# Altium PCB foot_left.PcbDoc
Units mm, origin at the board's own origin, x right, y up, seen from the top; angles counter-clockwise.
Board outline 100 x 65 mm, 2 copper layers (Top Layer, Bottom Layer), stack 1.52 mm thick; 55 components, 39 nets, 208 pads, 40 vias.
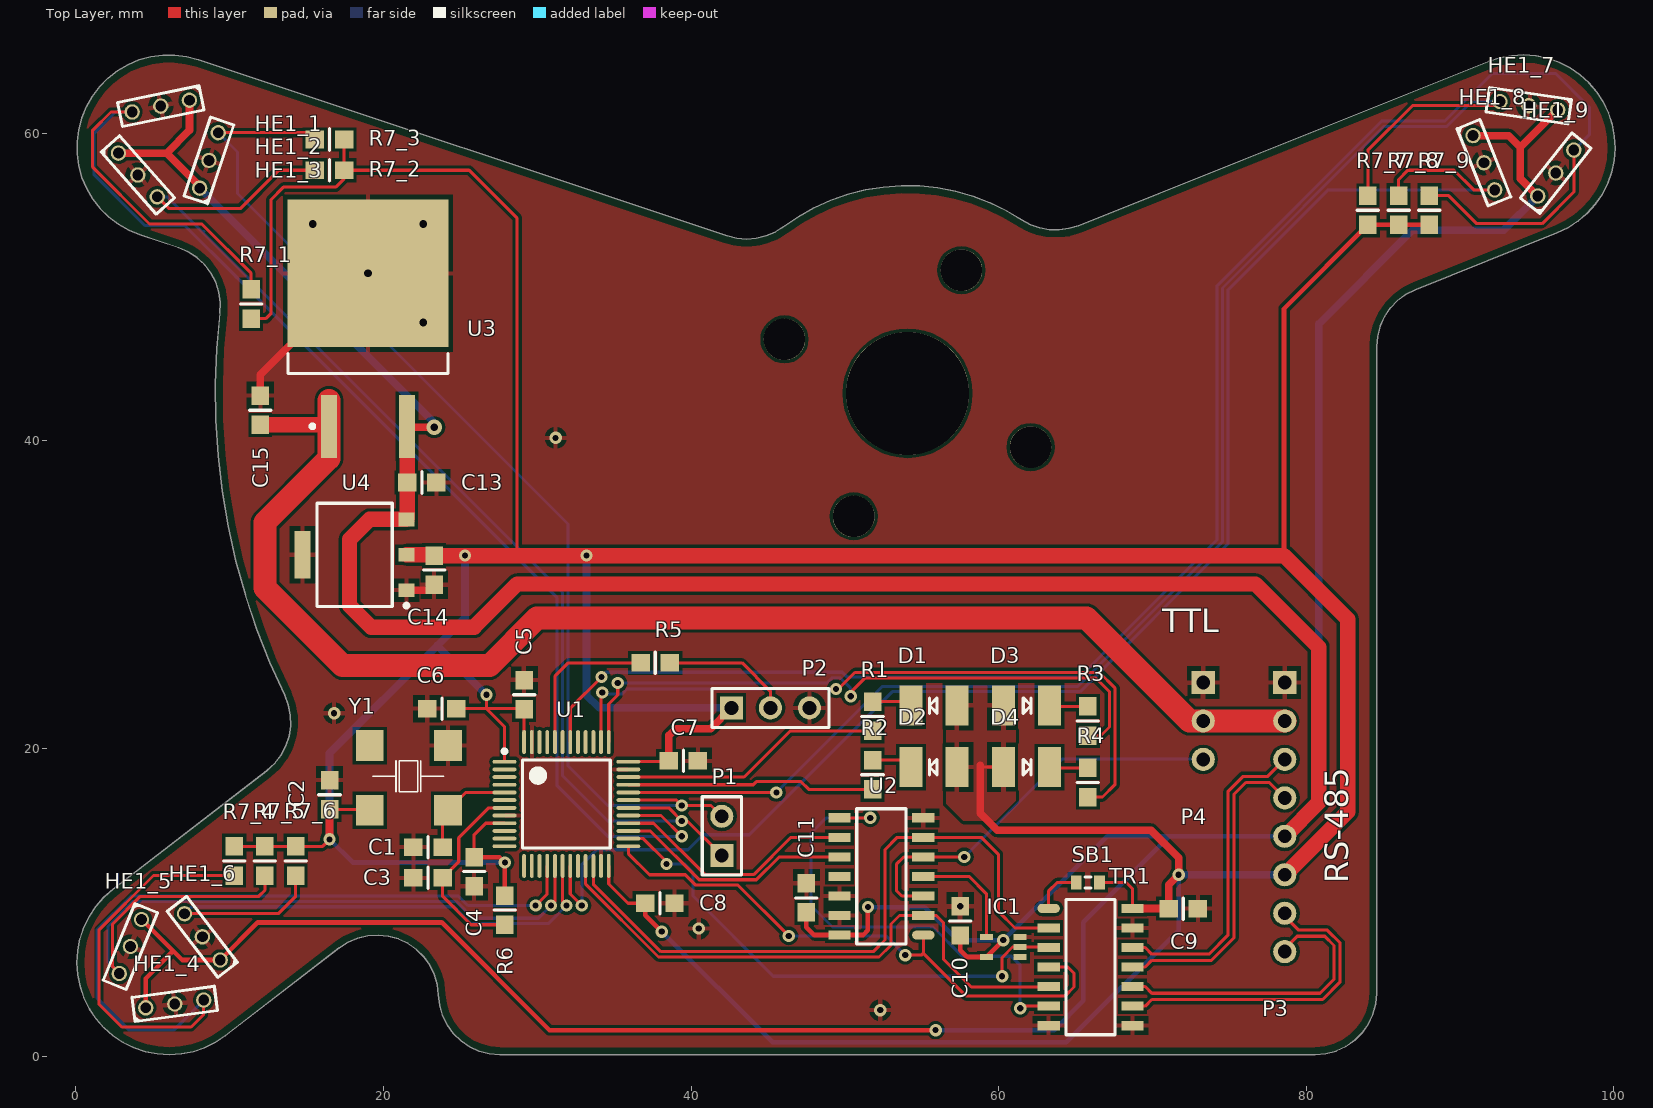
[diagram p0: Top Layer view]
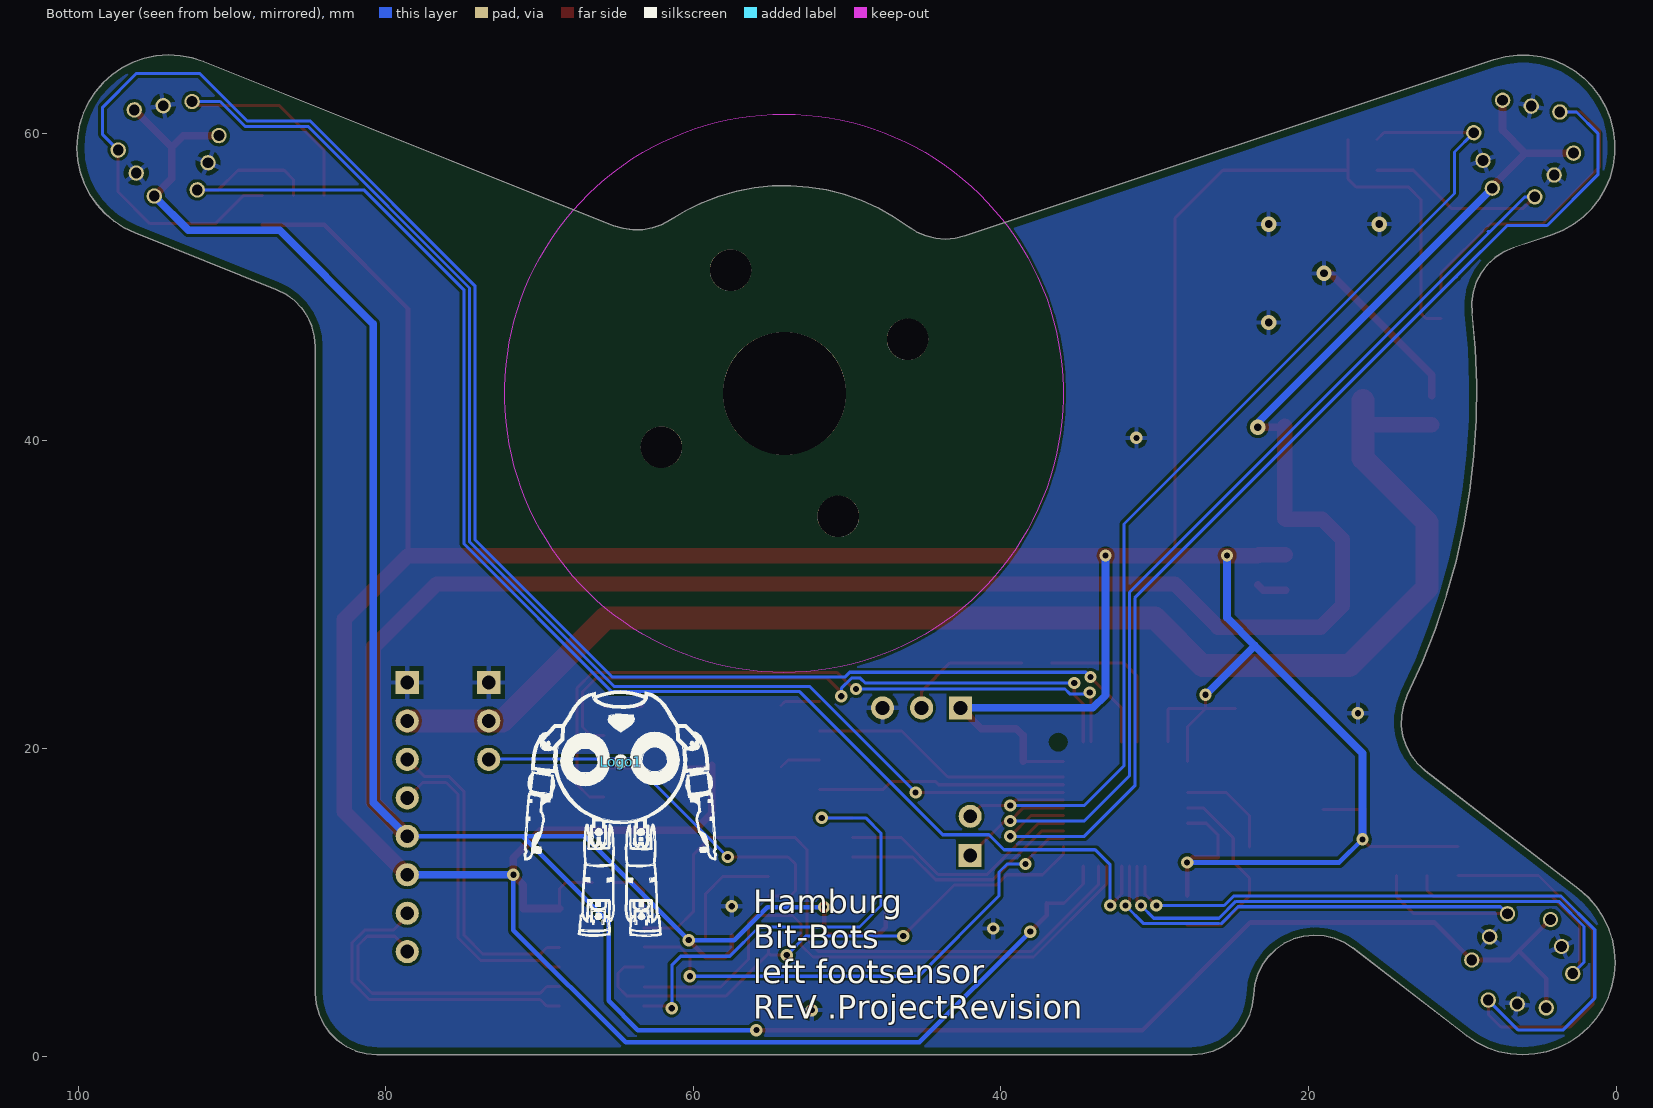
[diagram p1: Bottom Layer view, seen from below]
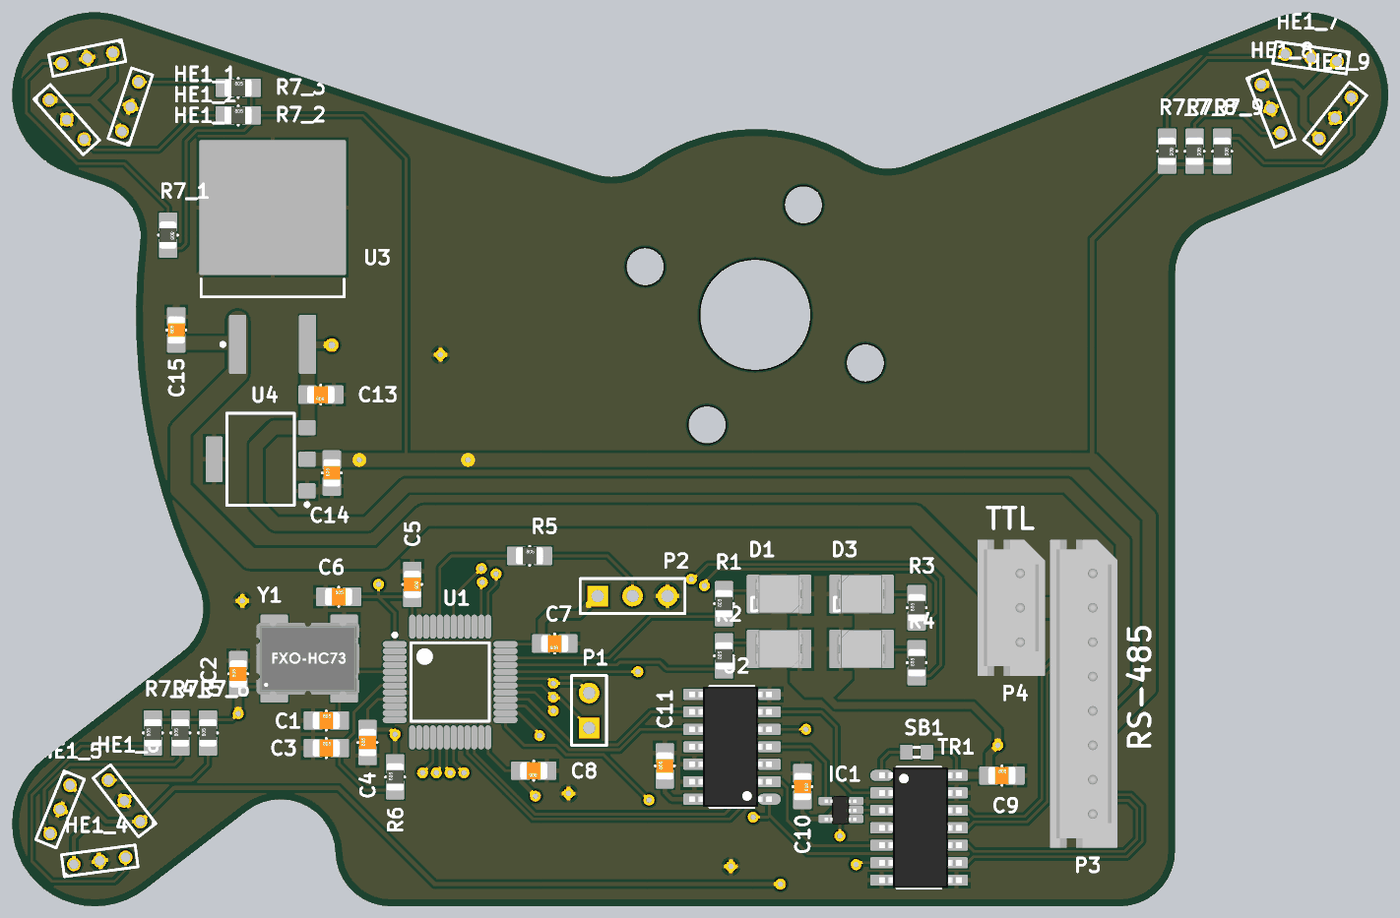
[diagram p2: 3D render of the assembled board from above, using the file's embedded part models]

## Layer stack, top to bottom
Top Solder: solder mask 0.0102, Solder Resist, Dk 3.5
Top Layer: signal copper 0.035
Dielectric 1: dielectric 1.45, FR-4, Dk 4.8
Bottom Layer: signal copper 0.035
Bottom Solder: solder mask 0.0102, Solder Resist, Dk 3.5

## Board outline
80.575,0.1 81.27,0.161 81.943,0.341 82.575,0.636 83.146,1.036 83.639,1.529 84.039,2.1 84.334,2.732 84.514,3.405 84.575,4.1 84.575,46.13 84.633,46.807 84.804,47.464 85.084,48.083 85.465,48.645 85.936,49.135 86.482,49.539 87.089,49.844 96.303,53.529 97.011,53.868 97.669,54.296 98.266,54.806 98.79,55.39 99.234,56.037 99.59,56.736 99.851,57.477 100.014,58.244 100.075,59.027 100.033,59.811 99.889,60.582 99.646,61.328 99.307,62.036 98.879,62.694 98.369,63.291 97.785,63.815 97.138,64.259 96.439,64.615 95.698,64.876 94.931,65.039 94.148,65.1 93.364,65.058 92.593,64.914 91.847,64.671 65.181,54.005 64.569,53.815 63.934,53.726 63.293,53.739 62.662,53.854 62.058,54.069 61.496,54.377 60.484,54.982 59.423,55.495 58.322,55.915 57.188,56.236 56.03,56.458 54.857,56.577 53.678,56.594 52.503,56.508 51.339,56.32 50.196,56.031 49.083,55.643 48.008,55.16 46.979,54.585 46.004,53.922 45.461,53.581 44.871,53.331 44.248,53.179 43.609,53.128 42.97,53.18 42.348,53.334 7.972,64.792 7.213,64.991 6.434,65.089 5.65,65.085 4.872,64.978 4.115,64.771 3.392,64.467 2.714,64.07 2.094,63.589 1.542,63.031 1.068,62.406 0.679,61.724 0.383,60.997 0.184,60.238 0.086,59.459 0.09,58.675 0.197,57.897 0.404,57.14 0.708,56.417 1.105,55.739 1.586,55.119 2.144,54.567 2.769,54.093 3.451,53.704 4.178,53.408 6.67,52.577 7.297,52.307 7.868,51.935 8.367,51.471 8.781,50.929 9.096,50.324 9.305,49.675 9.4,49 9.379,48.318 9.169,46.007 9.079,43.688 9.108,41.367 9.258,39.051 9.526,36.745 9.913,34.457 10.417,32.192 11.038,29.955 11.773,27.754 12.62,25.593 13.578,23.479 13.822,22.842 13.954,22.173 13.971,21.492 13.872,20.817 13.659,20.169 13.34,19.567 12.923,19.028 12.42,18.567 2.412,10.852 1.823,10.333 1.307,9.742 0.872,9.089 0.527,8.384 0.276,7.64 0.125,6.87 0.075,6.087 0.128,5.304 0.283,4.534 0.537,3.792 0.885,3.089 1.323,2.437 1.842,1.848 2.433,1.332 3.086,0.897 3.791,0.552 4.535,0.301 5.305,0.15 6.088,0.1 6.871,0.153 7.641,0.308 8.383,0.562 9.086,0.91 9.738,1.348 17.133,7.048 17.701,7.414 18.323,7.679 18.981,7.836 19.656,7.879 20.328,7.809 20.979,7.626 21.59,7.336 22.143,6.947 22.623,6.47 23.016,5.92 23.31,5.311 23.498,4.662 23.573,3.99 23.651,3.309 23.843,2.652 24.145,2.037 24.547,1.482 25.038,1.005 25.604,0.618 26.227,0.333 26.889,0.159 27.572,0.1

## Design rules (kind name [scope] priority, off if disabled: settings)
BoardOutlineClearance [All] p1: gap=0.5
Clearance [All] p1: gap=0.2 except(0.15: Track-Track)
ComponentClearance [All] p1: gap=0.2 collisioncheckmode=3 verticalgap=0.2 showdistances=FALSE
DiffPairsRouting [All] p1: maxlimit=0.3 minlimit=0.15 mostfreqgap=0.2 toplayer_minwidth=0.15 toplayer_maxwidth=0.3 toplayer_prefwidth=0.2 bottomlayer_minwidth=0.15 bottomlayer_maxwidth=0.3 bottomlayer_prefwidth=0.2 maxuncoupledlength=3
Height [All] p1: minheight=0 maxheight=30 prefheight=10
HoleSize [All] p1: absolutevalues=TRUE maxlimit=10 minlimit=0.1 maxpercent=80.000 minpercent=20.000
HoleToHoleClearance [All] p1: gap=0.2 allowstackedmicrovias=TRUE
MinimumSolderMaskSliver [All] p1: minsoldermaskwidth=0.2
PasteMaskExpansion [All] p1: expansion=0.1
PlaneClearance [All] p1: clearance=0.5
PlaneConnect [All] p1: planeconnectstyle=Relief reliefexpansion=0.5 reliefentries=4 reliefconductorwidth=0.2 reliefairgap=0.2
PolygonConnect [All] p1: connectstyle=Relief reliefconductorwidth=0.3 reliefentries=4 polygonreliefangle="90 Angle" airgapwidth=0.3
RoomDefinition "Component Keepout" [All] p1: confinementstyle=ConfineOut formatcopy=TRUE lockcomponents=FALSE outline 26.575,56.6 81.575,56.6 81.575,29.6 26.575,29.6
RoutingVias [All] p1: holewidth=0.4 width=0.8 viastyle="Through Hole" minholewidth=0.4 minwidth=0.8 maxholewidth=1 maxwidth=1.4
SilkToSilkClearance [All] p1: silktosilkclearance=0.1
SilkToSolderMaskClearance [IsPad] p1: minsilkscreentomaskgap=0.1 clearancetoexposedcopper=TRUE
SolderMaskExpansion [All] p1: expansion=0.1
Width Width_RS485 [(InDifferentialPairClass('All Differential Pairs'))] p1: maxlimit=0.254 minlimit=0.254 preferedwidth=0.254 impedancedriven=TRUE minimp=110.000000 maximp=130.000000 favimp=120.000000
Width [All] p2: maxlimit=5 minlimit=0.15 preferedwidth=0.2 minimp=50.000000 maximp=50.000000 favimp=50.000000
19 further rules are at their usual default settings.

## Classes and differential pairs
component class VR: C13 C14 C15 U3 U4
channel class A1356: HallSensorA HallSensorB HallSensorC HallSensorD HallSensorE HallSensorF HallSensorG HallSensorH HallSensorI
net class OUT[1..9]: OUT1 OUT2 OUT3 OUT4 OUT5 OUT6 OUT7 OUT8 OUT9
component class Connector: C9 C10 C11 IC1 P3 P4 SB1 TR1 U2
component class HallSensorI: HE1_9 R7_9
component class HallSensorH: HE1_8 R7_8
component class HallSensorG: HE1_7 R7_7
component class HallSensorF: HE1_6 R7_6
component class HallSensorE: HE1_5 R7_5
component class HallSensorD: HE1_4 R7_4
component class HallSensorC: HE1_3 R7_3
component class HallSensorB: HE1_2 R7_2
component class HallSensorA: HE1_1 R7_1
component class mainsheet: C1 C2 C3 C4 C5 C6 C7 C8 D1 D2 D3 D4 Logo1 P1 P2 R1 R2 R3 R4 R5 R6 U1 Y1
differential pair DY: +DY_P -DY_N
differential pair DA: +DA_P -DA_N

## Components (designator, comment, footprint, x,y, rotation, side; value= is the part's Value field where it differs from the comment)
C1 "15pF" C2012 22.9,13.6 r0 top
C2 "100nF" C2012 16.5,17 r90 top
C3 "100nF" C2012 22.9,11.6 r0 top
C4 "100nF" C2012 25.9,12 r90 top
C5 "100nF" C2012 29.15,23.5 r270 top
C6 "100nF" C2012 23.8,22.6 r0 top
C7 "100nF" C2012 39.5,19.2 r180 top
C8 "100nF" C2012 37.975,9.95 r180 top
C9 "1uF" C2012 72,9.6 r0 top
C10 "100nF" C2012 57.5,8.8 r270 top
C11 "1uF" C2012 47.5,10.3 r90 top
C13 "10uF" C2012 22.5,37.3 r180 top
C14 "10uF" C2012 23.3,31.6 r90 top
C15 "1uF" C2012 12,42 r90 top
D1 "Green" MLCC2 55.8,22.8 r180 top
D2 "Green" MLCC2 55.8,18.8 r180 top
D3 "Green" MLCC2 61.8,22.8 r0 top
D4 "Green" MLCC2 61.8,18.8 r0 top
HE1_1 "A1356" "3-PIN SIP" 7.39,62.15 r191.57 top locked (schematic designator HE1)
HE1_2 "A1356" "3-PIN SIP" 2.776,58.714 r311.58 top locked (schematic designator HE1)
HE1_3 "A1356" "3-PIN SIP" 8.057,56.437 r71.52 top locked (schematic designator HE1)
HE1_4 "A1356" "3-PIN SIP" 4.553,3.148 r7.62 top locked (schematic designator HE1)
HE1_5 "A1356" "3-PIN SIP" 4.279,8.894 r247.63 top locked (schematic designator HE1)
HE1_6 "A1356" "3-PIN SIP" 9.392,6.258 r127.63 top locked (schematic designator HE1)
HE1_7 "A1356" "3-PIN SIP" 96.344,61.525 r171.8 top locked (schematic designator HE1)
HE1_8 "A1356" "3-PIN SIP" 90.84,59.852 r291.81 top locked (schematic designator HE1)
HE1_9 "A1356" "3-PIN SIP" 95.041,55.922 r51.79 top locked (schematic designator HE1)
IC1 "74AHC1G04" SOT-353 60.3,7.1 r180 top
Logo1 "Hamburg Bit-Bots Logo" Logo 64.7,19.15 r180 bottom
P1 "Programming" HDR1X2 42,13.06 r90 top
P2 "Boot0" HDR1X3 42.62,22.65 r0 top
P3 "RS-485" 8-PIN 78.6,24.3 r270 top locked
P4 "TTL" 3-PIN 73.3,24.3 r270 top locked
R1 "1k" R2012 51.8,22.1 r90 top
R2 "1k" R2012 51.8,18.3 r90 top
R3 "1k" R2012 65.8,21.8 r90 top
R4 "1k" R2012 65.8,17.8 r90 top
R5 "4k7" R2012 37.675,25.575 r0 top
R6 "4k7" R2012 27.9,9.5 r90 top
R7_1 "4k7" R2012 11.4,48.9 r270 top (schematic designator R7)
R7_2 "4k7" R2012 16.5,57.6 r0 top (schematic designator R7)
R7_3 "4k7" R2012 16.5,59.6 r0 top (schematic designator R7)
R7_4 "4k7" R2012 10.3,12.7 r90 top (schematic designator R7)
R7_5 "4k7" R2012 12.3,12.7 r90 top (schematic designator R7)
R7_6 "4k7" R2012 14.3,12.7 r90 top (schematic designator R7)
R7_7 "4k7" R2012 84,55 r270 top (schematic designator R7)
R7_8 "4k7" R2012 86,55 r270 top (schematic designator R7)
R7_9 "4k7" R2012 88,55 r270 top (schematic designator R7)
SB1 "Solder Bridge" J1-0603 65.8,11.3 r0 top
TR1 "MAX3079" SOIC14 65.975,5.8 r0 top
U1 "STM32F100C8T6BTR" STM-LQFP48_L 31.9,16.4 r0 top
U2 "74HC126" SOIC14 52.375,11.69 r180 top
U3 "L7805CD2T-TR" TO-263_M 19,47.3 r90 top
U4 "NCP1117ST33T3G" ONSC-SOT-223_L 18.125,32.6 r180 top
Y1 "FXO-HC736R-16" FXO-HC73 19.12,20.2 r0 top

## Footprints (in the part's own frame and the unit in brackets; to place one, negate y for a bottom-side part, rotate by r counter-clockwise, add the part's x,y. Pads: shape width x height; smd on the part's side, far side on the other; paste and mask are expansions set on the pad)
3-PIN [mm] "2.5mm pitch"
  rect 1.5x1.5 hole 0.9: 1(0,0)
  round 1.5 hole 0.9: 2(2.5,0) 3(5,0)
  body extent -2.45,-3.07 7.45,1.83, height 5.95
"3-PIN SIP" [mm]
  round 1 hole 0.7: 1(0,0) 2(1.9,0) 3(3.8,0)
  silkscreen extent -0.8,-0.8 4.6,0.8
8-PIN [mm] "2.5mm pitch"
  rect 1.5x1.5 hole 0.9: 1(0,0)
  round 1.5 hole 0.9: 2(2.5,0) 3(5,0) 4(7.5,0) 5(10,0) 6(12.5,0) 7(15,0) 8(17.5,0)
  body extent -2.45,-3.1 19.95,1.8, height 5.95
C2012 [mm]
  rect 1.2x1.14 smd: 1(-0.95,0) 2(0.95,0)
  silkscreen extent 0,-0.7 0,0.7, body extent -1,-0.62 1,0.63, height 0.78
FXO-HC73 [mm]
  rect 1.8x2 smd: 1(0,0) 2(5.08,0) 3(5.08,-4.2) 4(0,-4.2)
  silkscreen extent 0.2,-3 4.8,-1, body extent -1.3,-4.71 6.2,0.51, height 1.41
HDR1X2 [mm] "Connector; Header; 2 Position"
  rect 1.5x1.5 hole 0.9: 1(0,0)
  round 1.5 hole 0.9: 2(2.54,0)
  silkscreen extent -1.27,-1.27 3.81,1.27
HDR1X3 [mm] "Connector; Header; 3 Position"
  rect 1.5x1.5 hole 0.9: 1(0,0)
  round 1.5 hole 0.9: 2(2.54,0) 3(5.08,0)
  silkscreen extent -1.27,-1.27 6.35,1.27
J1-0603 [mm] "Chip Resistor, Body 1.6x0.8mm, IPC High Density"
  rect 0.7x0.9 smd: 1(-0.75,0) 2(0.75,0)
  silkscreen extent -0.2,-0.35 0.2,0.35, body extent -0.85,-0.48 0.85,0.48, height 0.9
Logo [mm] "Logo of Hamburg Bit-Bots"
  silkscreen extent -6.31,-11.39 6.2,4.6
MLCC2 [mm]
  rect 1.5x2.6 smd: 1(-1.5,0) 2(1.5,0)
  silkscreen extent -0.2,-0.5 0.3,0.5, body extent -1.75,-1.4 1.75,1.4, height 1.7
ONSC-SOT-223_L [mm] "SOT223, 4-Leads, Body 3.7x6.7mm, Pitch 2.3mm, IPC High Density"
  rect 1.05x0.9 smd: 1(-3.375,2.3) 2(-3.375,0) 3(-3.375,-2.3)
  rect 1.05x3.1 smd: 4(3.375,0)
  silkscreen extent -3.5,-3.35 2.45,3.42, body extent -1.85,-3.35 1.85,3.35, height 1.8
R2012 [mm]
  rect 1.2x1.14 smd: 1(-0.95,0) 2(0.95,0)
  silkscreen extent 0,-0.7 0,0.7, body extent -1,-0.62 1,0.63, height 0.78
SOIC14 [mm] "SOIC, 14-Leads, Body 8,65x3,90mm, Pitch 1,27mm, IPC Medium Density"
  oval 1.45x0.6 smd: 1(-2.725,3.81)
  rect 1.45x0.6 smd: 2(-2.725,2.54) 3(-2.725,1.27) 4(-2.725,0) 5(-2.725,-1.27) 6(-2.725,-2.54) 7(-2.725,-3.81) 8(2.725,-3.81) 9(2.725,-2.54) 10(2.725,-1.27) 11(2.725,0) 12(2.725,1.27) 13(2.725,2.54) 14(2.725,3.81)
  silkscreen extent -1.6,-4.4 1.6,4.4, body extent -2.9,-4.37 3.1,4.37, height 1.75
SOT-353 [mm] "SOT23, 5-Leads, Body 2,05x2,13mm, Pitch 0,65mm, IPC Medium Density"
  rect 0.85x0.4 smd: 1(-1.1,0.65) 2(-1.1,0) 3(-1.1,-0.65) 4(1.1,-0.65) 5(1.1,0.65)
  body extent -1.13,-1.02 1.17,1.08, height 1
STM-LQFP48_L [mm] "QFP, 48-Leads, Body 7x7mm, Pitch 0.5mm, IPC High Density"
  oval 1.55x0.25 smd: 1(-4.025,2.75) 2(-4.025,2.25) 3(-4.025,1.75) 4(-4.025,1.25) 5(-4.025,0.75) 6(-4.025,0.25) 7(-4.025,-0.25) 8(-4.025,-0.75) 9(-4.025,-1.25) 10(-4.025,-1.75) 11(-4.025,-2.25) 12(-4.025,-2.75) 25(4.025,-2.75) 26(4.025,-2.25) 27(4.025,-1.75) 28(4.025,-1.25) 29(4.025,-0.75) 30(4.025,-0.25) 31(4.025,0.25) 32(4.025,0.75) 33(4.025,1.25) 34(4.025,1.75) 35(4.025,2.25) 36(4.025,2.75)
  oval 0.25x1.55 smd: 13(-2.75,-4.025) 14(-2.25,-4.025) 15(-1.75,-4.025) 16(-1.25,-4.025) 17(-0.75,-4.025) 18(-0.25,-4.025) 19(0.25,-4.025) 20(0.75,-4.025) 21(1.25,-4.025) 22(1.75,-4.025) 23(2.25,-4.025) 24(2.75,-4.025) 37(2.75,4.025) 38(2.25,4.025) 39(1.75,4.025) 40(1.25,4.025) 41(0.75,4.025) 42(0.25,4.025) 43(-0.25,4.025) 44(-0.75,4.025) 45(-1.25,4.025) 46(-1.75,4.025) 47(-2.25,4.025) 48(-2.75,4.025)
  silkscreen extent -4.15,-2.85 2.85,3.55, body extent -3.5,-3.5 3.5,3.5, height 1.6
TO-263_M [mm] "D2-PAK, 4-Leads, Body 9.2x10.2mm, Pitch 2.54mm, Lead Span 15.4mm, IPC Low Density"
  rect 4.1x1.05 smd: 1(-6.35,2.54) 3(-6.35,-2.54)
  rect 9.6x10.45 smd: 4(3.6,0)
  silkscreen extent -6.47,-5.2 -1.6,5.2, body extent -2.9,-5.2 6.45,5.2, height 4.6

## Part data
C1 C2 C3 C4 C5 C6 C7 C8 C10 C11 C13 C14 C15: library part Cap, "Capacitor"
C9: library part "Cap Semi", "Capacitor"
D1 D2 D3 D4: library part LED0, "Typical INFRARED GaAs LED"
HE1_1 HE1_2 HE1_3 HE1_4 HE1_5 HE1_6 HE1_7 HE1_8 HE1_9: "Linear Hall-Effect Sensor"
IC1: "Single Logic Inverter"
Logo1: library part Logo
P1: library part "Header 2", "Header, 2-Pin"
P2 P4: library part "Header 3", "Header, 3-Pin"
P3: library part "Header 8", "Header, 8-Pin"
R1 R2 R3 R4 R5 R6 R7_1 R7_2 R7_3 R7_4 R7_5 R7_6 R7_7 R7_8 R7_9: library part Res2, "Resistor"
SB1: library part Res3, "Resistor"
TR1: "MAX3079 RS485-Transreceiver"
U1: library part CMP-0237-00141-3, "ARM Cortex-M3 32-bit MCU, 64 KB Flash, 8 KB Internal RAM, 37 I/Os, 48-pin LQFP, -40 to 85 degC, Tape and Reel"
U2: "Quad 3-State Noninverting Buffer"
U3: library part CMP-0244-00213-1, "Positive Voltage Regulator, 3-Pin D2PAK, Tape and Reel"
U4: library part CMP-0592-00001-2, "1.0 A Low-Dropout Positive Fixed Voltage Regulator, 5 V Vout, 0 to 125 degC, 4-Pin SOT-223, Pb-Free, Tape and Reel"
Y1: library part Oszillator, "Oscillator with Enable Input"

## Free pads (board coordinates)
  round 2.7 hole 2.7 unplated: DH(46.075,46.6) DH(50.575,35.1) DH(57.575,51.1) DH(62.075,39.6)
  round 8 hole 8 unplated: DH(54.075,43.1)

## Via types
v1: diameter 0.8/0.8 (per signal layer), hole 0.4, Top Layer to Bottom Layer, 35 vias
v2: diameter 1/1 (per signal layer), hole 0.5, Top Layer to Bottom Layer, 5 vias

## Nets (pads, with @x,y where several pads share a name; then routed paths per layer and width w, separated by ;. In a path a pad name is that pad's centre, name@x,y a point inside that pad or via, vN(x,y) a via of type N, cw(c..) or ccw(c..) an arc to the next point about the centre after c; other vN are vias at no path point)
+3V3: C2.1 C4.2 C5.2 C6.2 C7.2 C8.2 C9.1 C14.2 D1.1 D2.1 D3.1 D4.1 P2.1 P3.6 R6.2 R7_1.2 R7_2.2 R7_3.2 R7_4.2 R7_5.2 R7_6.2 R7_7.2 R7_8.2 R7_9.2 SB1.2 TR1.14 U1.1 U1.9 U1.24 U1.36 U1.48 U4.2 Y1.4 | length 341.7
  Top Layer w0.2: R7_4.2 R7_5.2 R7_6.2 16.05,13.65 v1(16.5,14.1) ; R7_1.2 12.35,47.95 12.7,48.3 12.7,55.7 13.5,56.5 16.9,56.5 17.45,57.05 R7_2.2 ; C2.1 Y1.4@19.07,16.05 ; R7_3.2 R7_2.2 ; C6.2 26.7,22.6 ; C4.2 25.9,14.4 26.65,15.15 U1.9 ; v1(26.7,23.5) 26.7,22.6 ; U1.1 27.875,21.425 26.7,22.6 ; 28.7,32.55 28.7,54.475 25.575,57.6 R7_2.2 ; U1.48 C5.2 29.1,22.6 26.7,22.6 ; U1.24 34.65,11.2 35.9,9.95 C8.2 ; U1.36 C7.2@38.5,19.15 ; 58.8,18.9 58.9,18.8 D4.1 ; SB1.2 68.3,11.3 68.7,10.9 TR1.14
  Top Layer w0.3: C4.2 27.55,12.95 v1(27.9,12.6) R6.2 ; C8.2 37.025,9.175 v1(38.1,8.1) ; 78.55,32.55 78.55,48.6 R7_7.2 R7_8.2 R7_9.2
  Top Layer w0.5: v1(16.5,14.1) C2.1 ; C7.2 38.55,20.85 39,21.3 41.27,21.3 P2.1 ; 58.8,18.9 58.8,15.8 59.9,14.7 69.9,14.7 71.7,12.9 v1(71.7,11.8) 71.05,11.15 C9.1 71.04,9.61 TR1.14
  Top Layer w1: U4.2 23.25,32.6 C14.2 v1(25.3,32.55) 28.7,32.55 v1(33.2,32.55) 78.55,32.55 82.7,28.4 82.7,15.9 P3.6
  Bottom Layer w0.3: v1(16.5,14.1) 18,12.6 v1(27.9,12.6) ; v1(38.1,8.1) 45.3,0.9 64.4,0.9 71.7,8.2 v1(71.7,11.8)
  Bottom Layer w0.5: v1(16.5,14.1) 16.5,19.7 23.5,26.7 ; v1(25.3,32.55) 25.3,28.5 23.5,26.7 ; v1(26.7,23.5) 23.8,26.4 23.5,26.7 ; v1(33.2,32.55) 33.2,23.48 34.03,22.65 P2.1 ; v1(71.7,11.8) P3.6
+5V: C10.2 C11.1 C13.2 HE1_1.1 HE1_2.1 HE1_3.1 HE1_4.1 HE1_5.1 HE1_6.1 HE1_7.1 HE1_8.1 HE1_9.1 IC1.5 P3.5 U2.14 U3.3 U4.3 | length 317.1
  Top Layer w0.3: HE1_5.1 6.387,6.787 ; HE1_4.1 4.553,5.053 6.287,6.787 6.387,6.787 ; C11.1 47.5,8.4 48.02,7.88 U2.14 51.18,7.88 51.5,8.2 v1(51.5,9.7) ; v1(55.9,1.7) 30.8,1.7 23.8,8.7 11.834,8.7 HE1_6.1 6.915,6.258 6.387,6.787 ; C10.2 57.5,6.9 57.95,6.45 IC1.5 v1(60.3,7.55)
  Top Layer w0.5: HE1_2.1 5.914,58.714 ; HE1_1.1 7.39,60.19 5.914,58.714 ; HE1_3.1 8.057,56.571 5.914,58.714 ; U3.3 21.59,40.9 v2(23.3,40.9) ; HE1_8.1 93.148,59.852 93.9,59.1 ; HE1_9.1 93.9,57.063 93.9,59.1 ; HE1_7.1 93.919,59.1 93.9,59.1
  Top Layer w1: U3.3 21.54,34.94 U4.3 19.1,34.9 17.8,33.6 17.8,29.3 19.2,27.9 25.9,27.9 28.7,30.7 76.7,30.7 80.8,26.6 80.8,16.5 P3.5
  Bottom Layer w0.3: v1(51.5,9.7) 55.2,9.7 57.35,7.55 v1(60.3,7.55) 67.05,14.3 71.1,14.3 ; v1(55.9,1.7) 63.6,1.7 65.5,3.6 65.5,8.7 71.1,14.3 ; P3.5 71.1,14.3
  Bottom Layer w0.5: HE1_3.1 23.3,41.193 v2(23.3,40.9) ; P3.5 80.8,16.5 80.8,47.6 86.9,53.7 92.818,53.7 HE1_9.1
+12V: C15.1 P3.2 P4.2 U3.1 | length 90.7
  Top Layer w1: C15.1 U3.1@16.36,41.05
  Top Layer w1.5: U3.1@16.46,42.64 U3.1 16.46,38.86 12.3,34.7 12.3,30.461 17.361,25.4 26.9,25.4 30,28.5 65.7,28.5 72.4,21.8 P4.2 P3.2
\RST: C3.2 R6.1 U1.7 | length 12.8
  Top Layer w0.2: U1.7 26.85,16.15 24.9,14.2 24.9,12.65 C3.2 23.85,10.4 25.7,8.55 R6.1
BOOT0: R5.1 U1.44 | length 10.2
  Top Layer w0.2: U1.44 31.15,24.7 32.025,25.575 R5.1
DA_N: P3.4 TR1.11 | length 20.8
  Top Layer w0.2: TR1.11 69.525,5.8 69.96,6.235 73.835,6.235 75.3,7.7 75.3,17.034 76.066,17.8 77.6,17.8 P3.4
DA_P: P3.3 TR1.12 | length 20.8
  Top Layer w0.2: TR1.12 69.525,7.07 69.96,6.635 73.669,6.635 74.9,7.866 74.9,17.2 75.9,18.2 77.5,18.2 P3.3
DY_N: P3.7 TR1.9 | length 21
  Top Layer w0.2: TR1.9 69.525,3.26 69.96,3.695 81.061,3.695 82.2,4.834 82.2,7.366 81.366,8.2 79.5,8.2 P3.7@78.6,9.1
DY_P: P3.8 TR1.10 | length 19.6
  Top Layer w0.2: TR1.10 69.525,4.53 69.96,4.095 80.895,4.095 81.8,5 81.8,7.2 81.2,7.8 79.4,7.8 P3.8@78.6,7
GND: C1.1 C2.2 C3.1 C4.1 C5.1 C6.1 C7.1 C8.1 C9.2 C10.1 C11.2 C13.1 C14.1 C15.2 HE1_1.2 HE1_2.2 HE1_3.2 HE1_4.2 HE1_5.2 HE1_6.2 HE1_7.2 HE1_8.2 HE1_9.2 IC1.3 P2.3 P3.1 P4.1 TR1.7 TR1.8 TR1.13 U1.8 U1.23 U1.35 U1.47 U2.7 U2.12 U2.13 U3.4 U4.1 U4.4 Y1.2 | length 13
  Top Layer w0.5: C15.2 12,44.3 18.6,50.9 v2(19,50.9) ; U4.1 22.95,30.3 C14.1
  other v1: 52.3,3 40.5,8.3 57.5,9.75 16.8,22.3 31.2,40.2
  other v2: 22.6,47.7 15.4,54.1 22.6,54.1
NetC1_2: C1.2 U1.5 Y1.3 | length 6.7
  Top Layer w0.2: C1.2 23.85,15.65 Y1.3 25.35,17.15 U1.5
NetD1_2: D1.2 R1.2 | length 2.6
  Top Layer w0.2: R1.2 54.05,23.05 D1.2
NetD2_2: D2.2 R2.2 | length 2.7
  Top Layer w0.2: R2.2 53.85,19.25 D2.2
NetD3_2: D3.2 R3.2 | length 2.5
  Top Layer w0.2: D3.2 63.35,22.75 R3.2
NetD4_2: D4.2 R4.2 | length 2.5
  Top Layer w0.2: D4.2 63.35,18.75 R4.2
NetIC1_4: IC1.4 U2.4 | length 7.4
  Top Layer w0.2: U2.4 58.085,11.69 59.2,10.575 IC1.4
NetP2_2: P2.2 R5.2 | length 8.4
  Top Layer w0.2: R5.2 43.325,25.575 45.16,23.74 P2.2
NetR1_1: R1.1 U1.34 | length 17.1
  Top Layer w0.2: U1.34 43.45,18.15 46.45,21.15 R1.1
NetR2_1: R2.1 U1.33 | length 16.2
  Top Layer w0.2: U1.33 44.05,17.65 44.25,17.85 47.15,17.85 47.65,17.35 R2.1
NetR3_1: R3.1 U1.37 | length 41.9
  Top Layer w0.2: U1.37 34.65,22.9 35.238,23.488 v1(35.238,24.263) ; v1(50.38,23.403) 50.38,23.655 51.325,24.6 66.3,24.6 67.2,23.7 67.2,21.4 66.65,20.85 R3.1
  Bottom Layer w0.2: v1(35.238,24.263) 48.825,24.263 49.14,24.578 49.72,24.578 50.38,23.918 v1(50.38,23.403)
NetR4_1: R4.1 U1.38 | length 46
  Top Layer w0.2: U1.38 34.15,23.567 v1(34.233,23.65) ; v1(49.43,23.878) 49.578,23.878 50.65,24.95 66.55,24.95 67.55,23.95 67.55,17.65 66.75,16.85 R4.1
  Bottom Layer w0.2: v1(34.233,23.65) 34.319,23.563 35.528,23.563 35.843,23.878 v1(49.43,23.878)
NetSB1_1: SB1.1 TR1.1 | length 3.2
  Top Layer w0.2: TR1.1 63.25,10.75 63.8,11.3 SB1.1
OUT1: HE1_1.3 R7_1.1 U1.29 | length 92.6
  Top Layer w0.2: HE1_1.3 2.288,61.388 1.1,60.2 1.1,57.8 4.8,54.1 8.2,54.1 11.4,50.9 R7_1.1 ; U1.29 38.05,15.65 v1(39.4,14.3)
  Bottom Layer w0.2: HE1_1.3 2.588,61.388 1.2,60 1.2,57.3 4.492,54.008 7.092,54.008 10.4,50.7 ; 10.375,50.675 10.4,50.7 ; v1(39.4,14.3) 34.586,14.3 31.3,17.586 31.3,29.8 10.4,50.7
OUT2: HE1_2.3 P1.1 R7_2.1 U1.30 | length 77
  Top Layer w0.2: HE1_2.3 6.069,55.1 10.7,55.1 13.2,57.6 R7_2.1 ; U1.30 38.55,16.15 v1(39.4,15.3) 39.76,15.3 P1.1
  Bottom Layer w0.2: HE1_2.3 5.936,55.871 8.191,53.616 ; 8.341,53.616 8.191,53.616 ; v1(39.4,15.3) 34.586,15.3 31.65,18.236 31.65,30.157 8.191,53.616
OUT3: HE1_3.3 P1.2 R7_3.1 U1.31 | length 72
  Top Layer w0.2: HE1_3.3 15.109,60.041 R7_3.1 ; U1.31 39.05,16.65 v1(39.4,16.3) 41.3,16.3 P1.2
  Bottom Layer w0.2: HE1_3.3 10.514,58.788 10.514,56.086 32,34.6 32,18.886 34.586,16.3 v1(39.4,16.3)
OUT4: HE1_4.3 R7_4.1 U1.16 | length 69.4
  Top Layer w0.2: HE1_4.3 8.32,2.72 7.5,1.9 3,1.9 1.5,3.4 1.5,8.195 5.055,11.75 R7_4.1 ; v1(29.9,9.8) 30.65,10.55 U1.16
  Bottom Layer w0.2: HE1_4.3 6.368,1.7 3.477,1.7 1.4,3.777 1.4,8.227 3.591,10.418 24.877,10.418 25.495,9.8 v1(29.9,9.8)
OUT5: HE1_5.3 R7_5.1 U1.17 | length 51.5
  Top Layer w0.2: HE1_5.3 2.4,5.813 2.4,8.6 4.2,10.4 11.9,10.4 12.3,10.8 R7_5.1 ; v1(30.9,9.8) 31.15,10.05 U1.17
  Bottom Layer w0.2: HE1_5.3 2.1,6.113 2.1,8.432 3.736,10.068 24.732,10.068 25.825,8.975 30.075,8.975 v1(30.9,9.8)
OUT6: HE1_6.3 R7_6.1 U1.18 | length 37.5
  Top Layer w0.2: HE1_6.3 13.168,9.268 14.3,10.4 R7_6.1 ; U1.18 31.65,10.05 v1(31.9,9.8)
  Bottom Layer w0.2: HE1_6.3 7.522,9.718 24.587,9.718 25.68,8.625 ; 25.825,8.625 30.725,8.625 v1(31.9,9.8)
OUT7: HE1_7.3 R7_7.1 U1.32 | length 97.8
  Top Layer w0.2: U1.32 v1(45.55,17.15) ; R7_7.1 84,58.9 86.9,61.8 92.316,61.8 HE1_7.3
  Bottom Layer w0.2: v1(45.55,17.15) 52.45,24.05 65.155,24.05 74.55,33.445 74.55,49.95 85.05,60.45 89.145,60.45 90.762,62.067 HE1_7.3
OUT8: HE1_8.3 R7_8.1 U1.19 | length 101
  Top Layer w0.2: U1.19 32.15,10.55 v1(32.9,9.8) ; R7_8.1 86,57 86.6,57.6 89.6,57.6 90.876,56.324 HE1_8.3 HE1_8.3@92.126,56.45
  Bottom Layer w0.2: v1(32.9,9.8) 32.9,12.45 33.875,13.425 39.8,13.425 40.775,14.4 43.79,14.4 53.09,23.7 65.3,23.7 74.9,33.3 74.9,49.805 81.419,56.324 HE1_8.3
OUT9: HE1_9.3 R7_9.1 U1.42 | length 113.3
  Top Layer w0.2: U1.42 32.15,22.625 v1(34.175,24.65) ; R7_9.1 89.25,55.95 91.071,54.129 95.329,54.129 97.391,56.191 HE1_9.3
  Bottom Layer w0.2: v1(34.175,24.65) 34.488,24.963 49.83,24.963 50.147,24.646 65.256,24.646 74.2,33.59 74.2,50.1 84.9,60.8 89,60.8 92.1,63.9 96.2,63.9 98.4,61.7 98.4,59.918 HE1_9.3
SRL: TR1.6 U2.8 | length 30.9
  Top Layer w0.2: U2.8 v1(51.65,15.5) ; v1(61.4,3.125) 61.535,3.26 TR1.6
  Bottom Layer w0.2: v1(51.65,15.5) 48.8,15.5 47.8,14.5 47.8,9.8 49.2,8.4 55.725,8.4 57.625,6.5 60.825,6.5 61.4,5.925 v1(61.4,3.125)
TRI1.A: U1.28 U2.9 | length 16.1
  Top Layer w0.2: U1.28 37.56,15.15 40.885,11.825 44.1,11.825 46.505,14.23 U2.9
TRI1.OE: U1.27 U2.10 | length 15.7
  Top Layer w0.2: U1.27 37.35,14.65 40.525,11.475 44.245,11.475 45.73,12.96 U2.10
TTL_BRIDGE.\RE: IC1.2 TR1.3 U1.26 | length 33.5
  Top Layer w0.2: U1.26 36.893,14.15 38.4,12.643 v1(38.4,12.5) ; v1(60.225,5.2) 60.225,6.425 60.9,7.1 IC1.2 TR1.3@63.22,7.1
  Bottom Layer w0.2: v1(38.4,12.5) 39.6,12.5 40.125,11.975 40.125,10.425 45.35,5.2 v1(60.225,5.2)
TTL_BRIDGE.DE: TR1.4 U1.25 U2.1 | length 37.5
  Top Layer w0.2: U1.25 35.925,13.175 37.3,11.8 39.625,11.8 40.3,11.125 43.05,11.125 v1(46.35,7.825) ; v1(53.925,6.575) 54.975,6.575 55.1,6.7 ; U2.1 55.1,6.7 ; TR1.4 64.5,5.8 64.9,5.4 64.9,4.5 64.33,3.93 57.87,3.93 55.1,6.7
  Bottom Layer w0.2: v1(46.35,7.825) 52.675,7.825 v1(53.925,6.575)
TTL_BRIDGE.RX: TR1.2 U1.22 U2.6 | length 43.7
  Top Layer w0.2: U1.22 33.65,11.185 38.035,6.8 51.85,6.8 52.605,7.555 52.605,13.43 53.405,14.23 U2.6 58.87,14.23 59.975,13.125 59.975,9.425 61.06,8.34 TR1.2
TTL_BRIDGE.TX: TR1.5 U1.21 U2.2 | length 38.5
  Top Layer w0.2: U1.21 33.15,11.19 37.89,6.45 52.225,6.45 53,7.225 53,8.6 53.55,9.15 U2.2 55.95,9.15 56.4,8.7 56.4,6.325 58.225,4.5 TR1.5@63.22,4.5
TTL_DATA: P4.3 U2.3 U2.5 | length 26.4
  Top Layer w0.2: U2.3 53.705,10.42 53.35,10.775 53.35,12.475 53.835,12.96 U2.5 v1(57.76,12.96)
  Bottom Layer w0.2: v1(57.76,12.96) 64.125,19.325 73.275,19.325 P4.3
pads on no net: IC1.1 U1.2 U1.3 U1.4 U1.6 U1.10 U1.11 U1.12 U1.13 U1.14 U1.15 U1.20 U1.39 U1.40 U1.41 U1.43 U1.45 U1.46 U2.11 Y1.1

## Polygon pours and split planes (outlines as drawn)
GND on Bottom Layer "GND_L02_P004" (solid, remove dead copper, pour order 4): -3.4,68.1 -3.4,-0.1 100.8,-0.1 100.8,68.1
+3V3 on Top Layer "+3V3_L01_P002" (solid, remove dead copper, pour order 2): 56.6,24.1 56.6,16.4 57.7,15.3 59.8,15.3 61.1,16.6 61.1,24.1
GND on Top Layer "GND_L01_P006" (solid, remove dead copper, pour order 6): -3.4,68.1 -3.4,-0.1 100.8,-0.1 100.8,68.1

## Keep-outs
Bottom Layer:
  region: 54.11,61.248 ccw(c54.11,43.097) 54.11,24.946 ccw(c54.11,43.097)

## Silkscreen, mask and mechanical layers (free items; w line width, h text height)
Bottom Overlay:
  text "Hamburg / Bit-Bots / left footsensor / REV .ProjectRevision" at 56.1,2.45 h1.52
Mechanical 1:
  drawing of 703 lines, arcs and shapes, not listed
Drill Drawing:
  circle w0.254: c2.878,85.447 r0.847
  lines w0.254: 2.031,73.17 3.725,73.17 3.725,74.863 2.031,74.863 2.031,73.17 ; 2.031,76.98 2.878,77.403 3.725,76.98 3.301,77.827 3.725,78.673 2.878,78.25 2.031,78.673 2.455,77.827 2.031,76.98 ; 2.031,81.213 2.455,81.213 2.455,80.79 3.301,80.79 3.301,81.213 3.725,81.213 3.725,82.06 3.301,82.06 3.301,82.483 2.455,82.483 2.455,82.06 2.031,82.06 2.031,81.213 ; 2.031,90.103 3.725,90.103 2.878,88.41 2.031,90.103 ; 2.031,92.643 2.455,92.643 2.878,92.22 3.301,92.643 3.725,92.643 3.301,93.067 3.725,93.49 3.301,93.49 2.878,93.913 2.455,93.49 2.031,93.49 2.455,93.067 2.031,92.643
  lines w0.381: 0.513,72.027 99.039,72.027 ; 0.513,94.887 99.039,94.887 ; 14.505,68.217 14.505,98.697 ; 32.229,68.217 32.229,98.697 ; 66.408,68.217 66.408,98.697 ; 79.257,68.217 79.257,98.697 ; 0.513,68.217 99.039,68.217 99.039,98.697 0.513,98.697 0.513,68.217
  text "Symbol" at 2.799,96.03 h1.83
  text "Hit Count" at 15.648,96.03 h1.83
  text "Finished Hole Size" at 33.372,96.03 h1.83
  text "Plated" at 67.551,96.03 h1.83
  text "Hole Type" at 80.4,96.03 h1.83
  text "1" at 15.648,92.22 h1.52
  text "8,0000mm" at 33.372,92.22 h1.52
  text "NPTH" at 67.551,92.22 h1.52
  text "Round" at 80.4,92.22 h1.52
  text "4" at 15.648,88.41 h1.52
  text "2,7000mm" at 33.372,88.41 h1.52
  text "NPTH" at 67.551,88.41 h1.52
  text "Round" at 80.4,88.41 h1.52
  text "16" at 15.648,84.6 h1.52
  text "0,9000mm" at 33.372,84.6 h1.52
  text "PTH" at 67.551,84.6 h1.52
  text "Round" at 80.4,84.6 h1.52
  text "27" at 15.648,80.79 h1.52
  text "0,7000mm" at 33.372,80.79 h1.52
  text "PTH" at 67.551,80.79 h1.52
  text "Round" at 80.4,80.79 h1.52
  text "5" at 15.648,76.98 h1.52
  text "0,5000mm" at 33.372,76.98 h1.52
  text "PTH" at 67.551,76.98 h1.52
  text "Round" at 80.4,76.98 h1.52
  text "35" at 15.648,73.17 h1.52
  text "0,4000mm" at 33.372,73.17 h1.52
  text "PTH" at 67.551,73.17 h1.52
  text "Round" at 80.4,73.17 h1.52
  text "88 Total" at 15.648,69.36 h1.52